# Altium PCB solar_plant_watering_alarm.PcbDoc
Units mm, origin at the board's own origin, x right, y up, seen from the top; angles counter-clockwise.
Board outline 30.99 x 36.58 mm, 2 copper layers (Top Layer, Bottom Layer); 10 components, 8 nets, 25 pads, 0 vias.
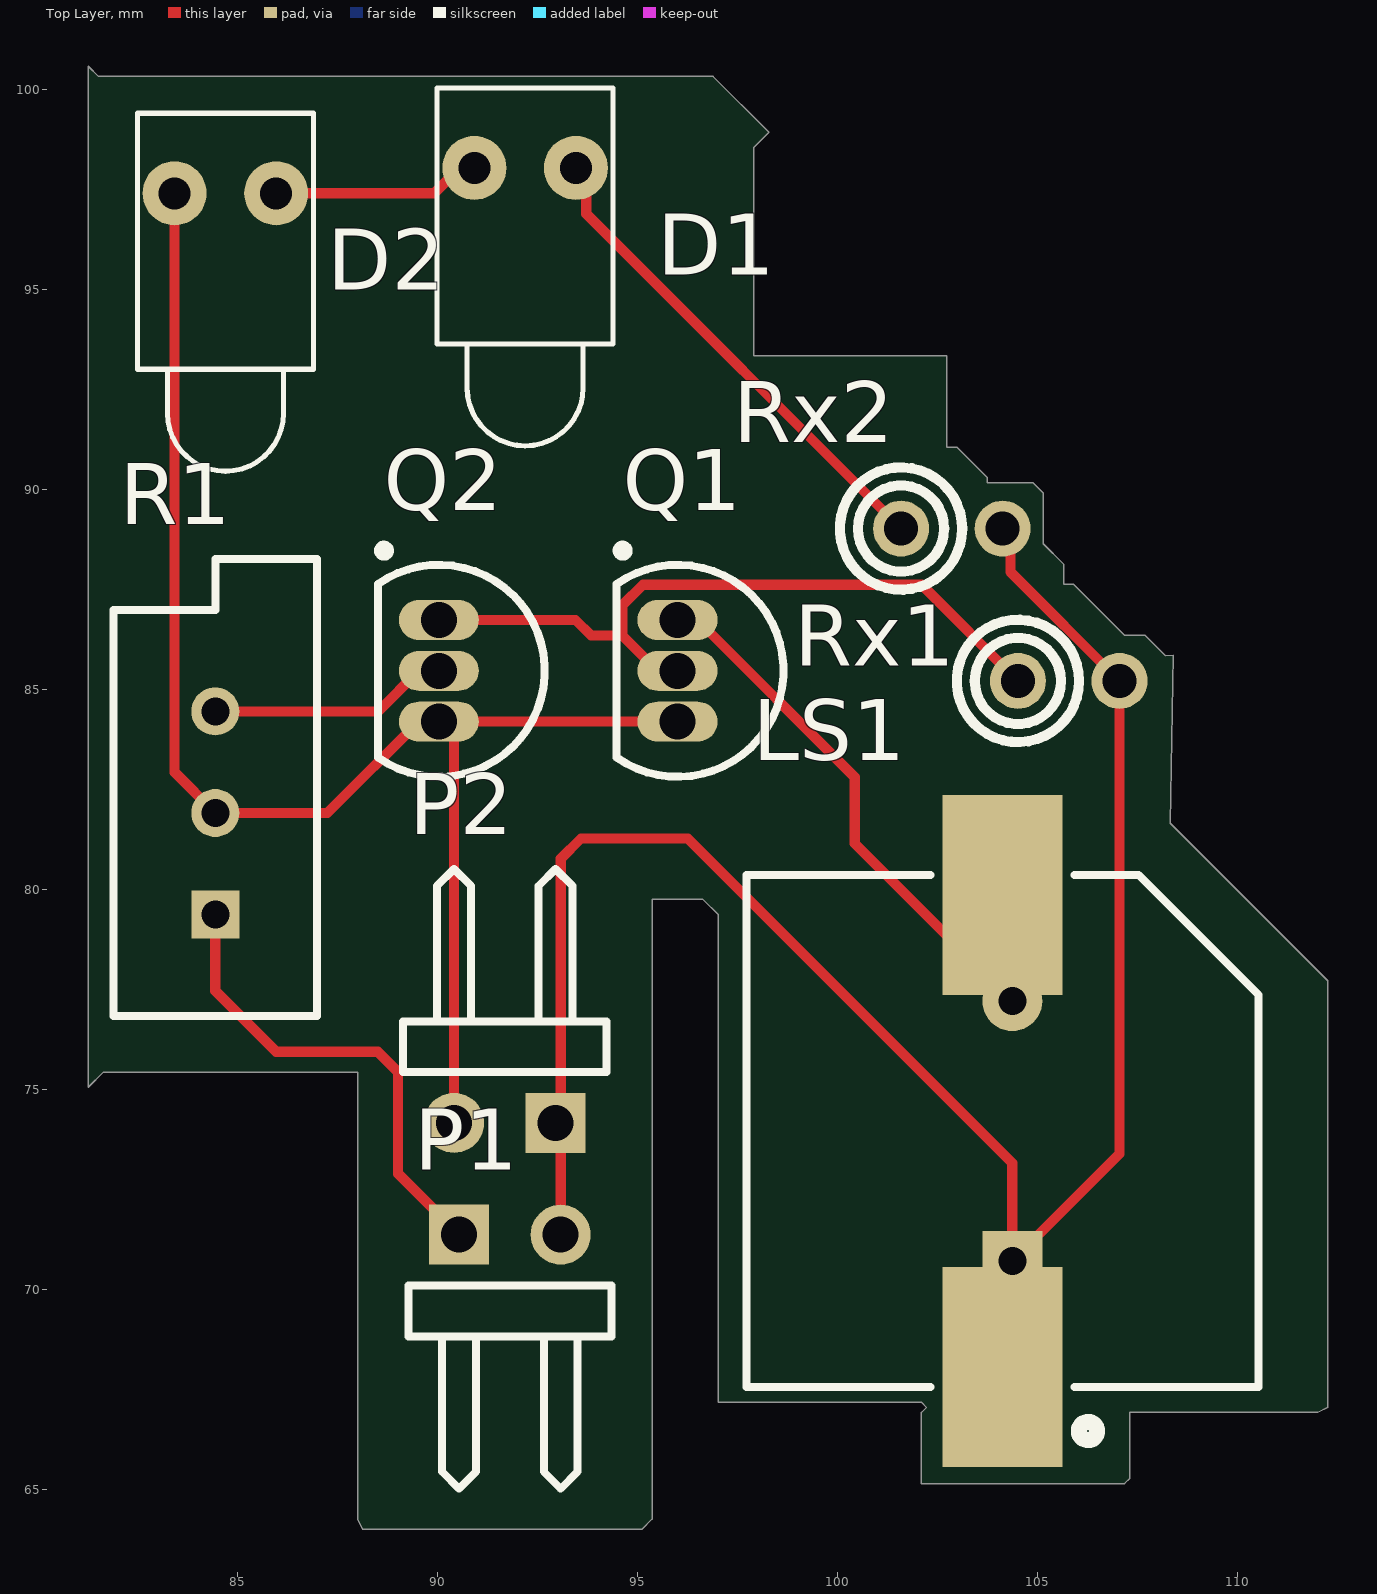
[diagram p0: Top Layer view]
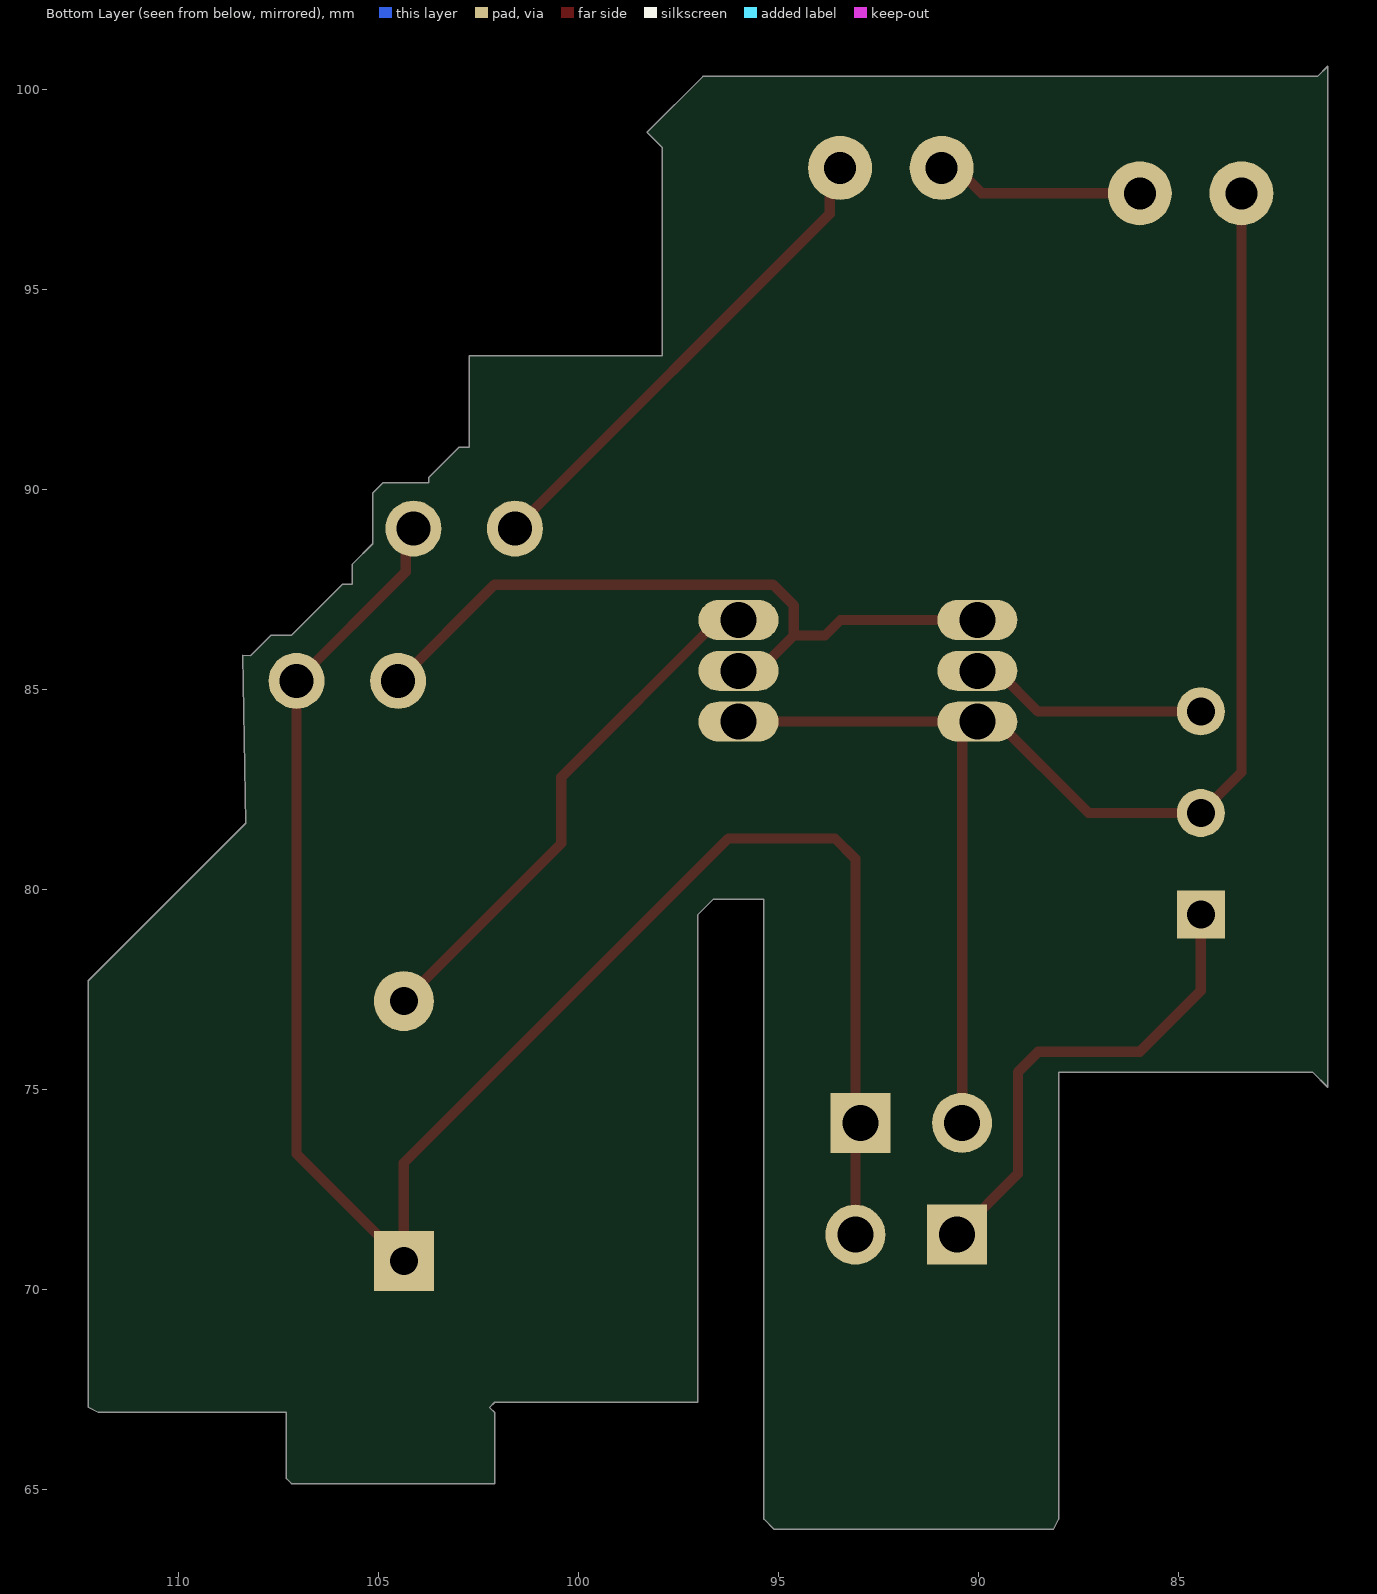
[diagram p1: Bottom Layer view, seen from below]

## Layer stack, top to bottom
Top Solder: solder mask 0.0102, Solder Resist, Dk 3.5
Top Layer: signal copper 0.0356
Dielectric 1: dielectric 0.32, FR-4, Dk 4.8
Bottom Layer: signal copper 0.0356
Bottom Solder: solder mask 0.0102, Solder Resist, Dk 3.5

## Board outline
102.743,93.345 102.743,91.059 102.997,91.059 103.759,90.297 103.759,90.17 104.902,90.17 105.156,89.916 105.156,88.646 105.664,88.138 105.664,87.63 105.918,87.63 107.188,86.36 107.696,86.36 108.204,85.852 108.406,85.855 108.331,81.661 112.268,77.724 112.268,67.056 112.014,66.929 107.315,66.929 107.315,65.278 107.188,65.151 102.108,65.151 102.108,66.929 102.235,67.056 102.108,67.183 97.028,67.183 97.028,79.375 96.647,79.756 95.377,79.756 95.377,64.262 95.123,64.008 88.138,64.008 88.011,64.262 88.011,75.438 81.661,75.438 81.28,75.057 81.28,100.584 81.534,100.33 96.901,100.33 98.298,98.933 97.917,98.552 97.917,93.345

## Design rules (kind name [scope] priority, off if disabled: settings)
Clearance [All] p1: gap=0.254 ignorepadtopadclearanceinfootprint=FALSE except(0: Arc-Hole Track-Hole SMDPad-Hole THPad-Hole Via-Hole Fill-Hole Poly-Hole Region-Hole Text-Hole)
PolygonConnect [All] p1: connectstyle=Relief reliefconductorwidth=0.254 reliefentries=4 polygonreliefangle="90 Angle" airgapwidth=0.254
RoomDefinition Sheet1 [InComponentClass('Sheet1')] p1: confinementstyle=ConfineIn formatcopy=TRUE lockcomponents=FALSE outline 0,0 50.8,0 50.8,25.4 0,25.4
RoutingVias [All] p1: holewidth=0.711 width=1.27 viastyle="Through Hole" minholewidth=0.711 minwidth=1.27 maxholewidth=0.711 maxwidth=1.27
SolderMaskExpansion [All] p1: expansion=0.102 istentingtop=FALSE
Width [All] p1: maxlimit=0.254 minlimit=0.254 preferedwidth=0.254
30 further rules are at their usual default settings.

## Components (designator, comment, footprint, x,y, rotation, side; value= is the part's Value field where it differs from the comment)
D1 "LED1" LED-1 92.202,98.044 r270 top
D2 "LED2" LED-1 84.709,97.409 r270 top
LS1 "Buzzer" ABSM-1574 104.14,68.065 r90 top
P1 "Header 2H" HDR1X2H 90.551,71.374 r0 top
P2 "Header 2H" HDR1X2H 92.964,74.168 r180 top
Q1 "NPN" TO-226-AA 96.012,85.471 r180 top
Q2 "NPN" TO-226-AA 90.043,85.471 r180 top
R1 "RPot" VR5 84.455,81.915 r90 top value=1K
Rx1 "Res1" AXIAL-0.1-RES 105.791,85.217 r0 top value=100
Rx2 "Res1" AXIAL-0.1-RES 102.87,89.027 r0 top value=100

## Footprints (in the part's own frame and the unit in brackets; to place one, negate y for a bottom-side part, rotate by r counter-clockwise, add the part's x,y. Pads: shape width x height; smd on the part's side, far side on the other; paste and mask are expansions set on the pad)
ABSM-1574 [mm] "Magnetic Transducer Buzzer"
  rect 5x3 smd: 1(0,0) 2(11.8,0)
  rect 1.5x1.5 hole 0.7: 1A(2.65,-0.24)
  round 1.5 hole 0.7: 2A(9.15,-0.24)
  silkscreen extent -1.83,-6.4 12.3,6.4
AXIAL-0.1-RES [mm] "Axial Device, Thru-Hole; 2 Leads; 0.3 in Pin Spacing"
  round 1.4 hole 0.85: 1(-1.27,0) 2(1.27,0)
  silkscreen extent -2.8,-1.53 0.26,1.53
HDR1X2H [mm] "Connector; Header; 2 Position; Right Angle"
  rect 1.5x1.5 hole 0.9: 1(0,0)
  round 1.5 hole 0.9: 2(2.54,0)
  silkscreen extent -1.27,-6.35 3.81,-1.27
LED-1 [mm] "LED; 2 Leads"
  round 1.6 hole 0.8: 1(0,1.27) 2(0,-1.27)
  silkscreen extent -2,-2.2 6.95,2.2
TO-226-AA [mm] "TO, Flat Index; 3 In-Line, Axial Leads; Body Dia. 4.8mm; Leads 0.55 x 0.51 mm (max)"
  oval 2x1 hole 0.9: 1(0,-1.27) 2(0,0) 3(0,1.27)
  silkscreen extent -2.65,-3.13 1.52,2.65, body extent -2.65,-2.66 1.52,2.66, height 5.33
VR5 [mm] "Thru-Hole; 3 Leads"
  rect 1.2x1.2 hole 0.7: 1(-2.54,0)
  round 1.2 hole 0.7: 2(0,0) 3(2.54,0)
  silkscreen extent -5.08,-2.54 6.35,2.54

## Part data
D1: "Typical RED GaAs LED", LatestRevisionDate=08-Jul-2005, LatestRevisionNote="Mech Layer 1 removed.", PackageDescription="LED; 2 Leads", PackageReference=LED-1, Published=8-Jun-2000, Publisher="Altium Limited"
D2: library part LED1, "Typical RED GaAs LED", LatestRevisionDate=08-Jul-2005, LatestRevisionNote="Mech Layer 1 removed.", PackageDescription="LED; 2 Leads", PackageReference=LED-1, Published=8-Jun-2000, Publisher="Altium Limited"
LS1: "Magnetic Transducer Buzzer", ComponentLink1Description="Manufacturer Link", ComponentLink1URL=http://www.megastar.com/linecard/buzzmode/index.php, DatasheetVersion=17-Dec-2003, LatestRevisionDate=17-Dec-2003, LatestRevisionNote="Schematic revised, PCB Footprint replaced.", PackageDescription="Magnetic Transducer Buzzer", PackageReference=ABSM-1574, Published=24-Mar-1999, Publisher="Altium Limited"
P1 P2: "Header, 2-Pin, Right Angle", LatestRevisionDate=17-Jul-2002, LatestRevisionNote="Re-released for DXP Platform.", Publisher="Altium Limited"
Q1 Q2: "NPN Bipolar Transistor", Code_JEDEC=TO-226-AA, LatestRevisionDate=17-Jul-2002, LatestRevisionNote="Re-released for DXP Platform.", PackageDescription="TO, Flat Index; 3 In-Line, Axial Leads; Body Dia. 4.8mm; Leads 0.55 x 0.51 mm (max)", PackageReference=TO-226-AA, Published=8-Jun-2000, Publisher="Altium Limited"
R1: "Potentiometer", LatestRevisionDate=17-Jul-2002, LatestRevisionNote="Re-released for DXP Platform.", PackageDescription="Variable Resistor, Thru-Hole; 3 Leads", PackageReference=VR5, Published=8-Jun-2000, Publisher="Altium Limited", Set Position=0.5, Sim Note="Enter the Resistance value and the set point into parameter fields."
Rx1 Rx2: library part "RES 100 OHM 5% 1/4W AXIAL", "Resistor", Manufacturer Part Number=CFR-25JB-52-100R, Power Rating=1/4W, Tolerance=0.05, LatestRevisionDate=17-Jul-2002, LatestRevisionNote="Re-released for DXP Platform.", Published=8-Jun-2000, Publisher="Altium Limited"

## Nets (pads, with @x,y where several pads share a name; then routed paths per layer and width w, separated by ;. In a path a pad name is that pad's centre, name@x,y a point inside that pad or via, vN(x,y) a via of type N, cw(c..) or ccw(c..) an arc to the next point about the centre after c; other vN are vias at no path point)
GND: D2.2 P2.2 Q1.3 Q2.3 R1.2 | length 38.6
  Top Layer w0.254: D2.2 83.439,82.931 R1.2 87.257,81.915 89.543,84.201 Q2.3 Q2.3@90.075,84.201 ; P2.2 90.42,74.172 90.42,83.856 Q2.3@90.075,84.201 ; Q1.3 Q2.3@90.075,84.201
NetD1_1: D1.1 Rx2.1 | length 12.4
  Top Layer w0.254: D1.1 93.73,97.786 93.73,96.897 Rx2.1
NetD1_2: D1.2 D2.1 | length 5.2
  Top Layer w0.254: D2.1 89.933,97.409 90.568,98.044 D1.2
NetLS1_1: LS1.1 LS1.1A P1.2 P2.1 Rx1.2 Rx2.2 | length 50.2
  Top Layer w0.254: P2.1 93.091,74.041 P1.2 93.091,74.168 93.091,80.772 93.599,81.28 96.266,81.28 104.38,73.166 LS1.1A 107.061,73.396 Rx1.2 104.332,87.946 104.332,88.835 Rx2.2
NetLS1_2: LS1.2 LS1.2A Q1.1 | length 13.3
  Top Layer w0.254: Q1.1 96.512,86.741 100.443,82.81 100.443,81.153 LS1.2A
NetP1_1: P1.1 R1.1 | length 12
  Top Layer w0.254: R1.1 84.455,77.47 85.979,75.946 88.519,75.946 89.027,75.438 89.027,72.898 P1.1
NetQ1_2: Q1.2 Q2.1 Rx1.1 | length 18.3
  Top Layer w0.254: Q2.1 93.462,86.741 93.851,86.352 94.631,86.352 ; Q1.2 95.512,85.471 94.631,86.352 ; Rx1.1 102.116,87.622 95.147,87.622 94.631,87.106 94.631,86.352
NetQ2_2: Q2.2 R1.3 | length 6
  Top Layer w0.254: R1.3 88.527,84.455 89.543,85.471 Q2.2

## Polygon pours and split planes (outlines as drawn)
GND on Bottom Layer "GND_L02_P001" (solid, pour order 1): 55.372,110.617 139.573,110.617 141.605,112.649 143.129,111.125 143.129,41.529 55.372,41.529